# Altium PCB adc front end.PcbDoc
Units mm, origin at the board's own origin, x right, y up, seen from the top; angles counter-clockwise.
Board outline 56.13 x 31.88 mm, 2 copper layers (Top Layer, Bottom Layer); 33 components, 47 nets, 121 pads, 86 vias.
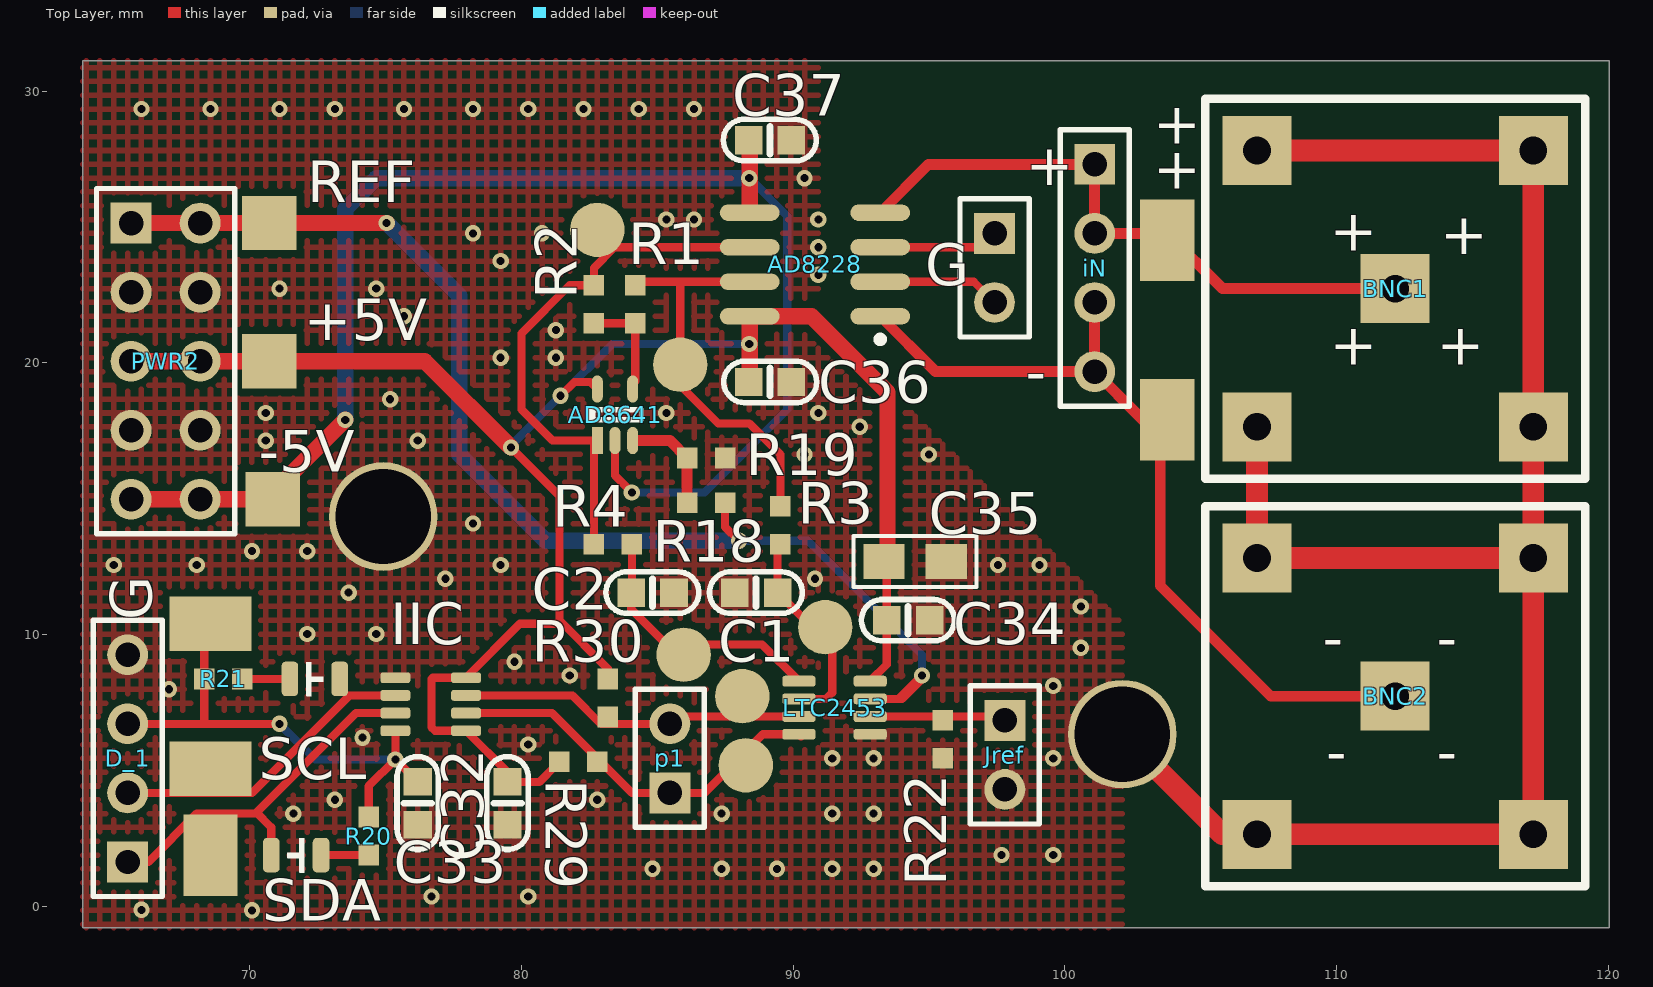
[diagram p0: Top Layer view]
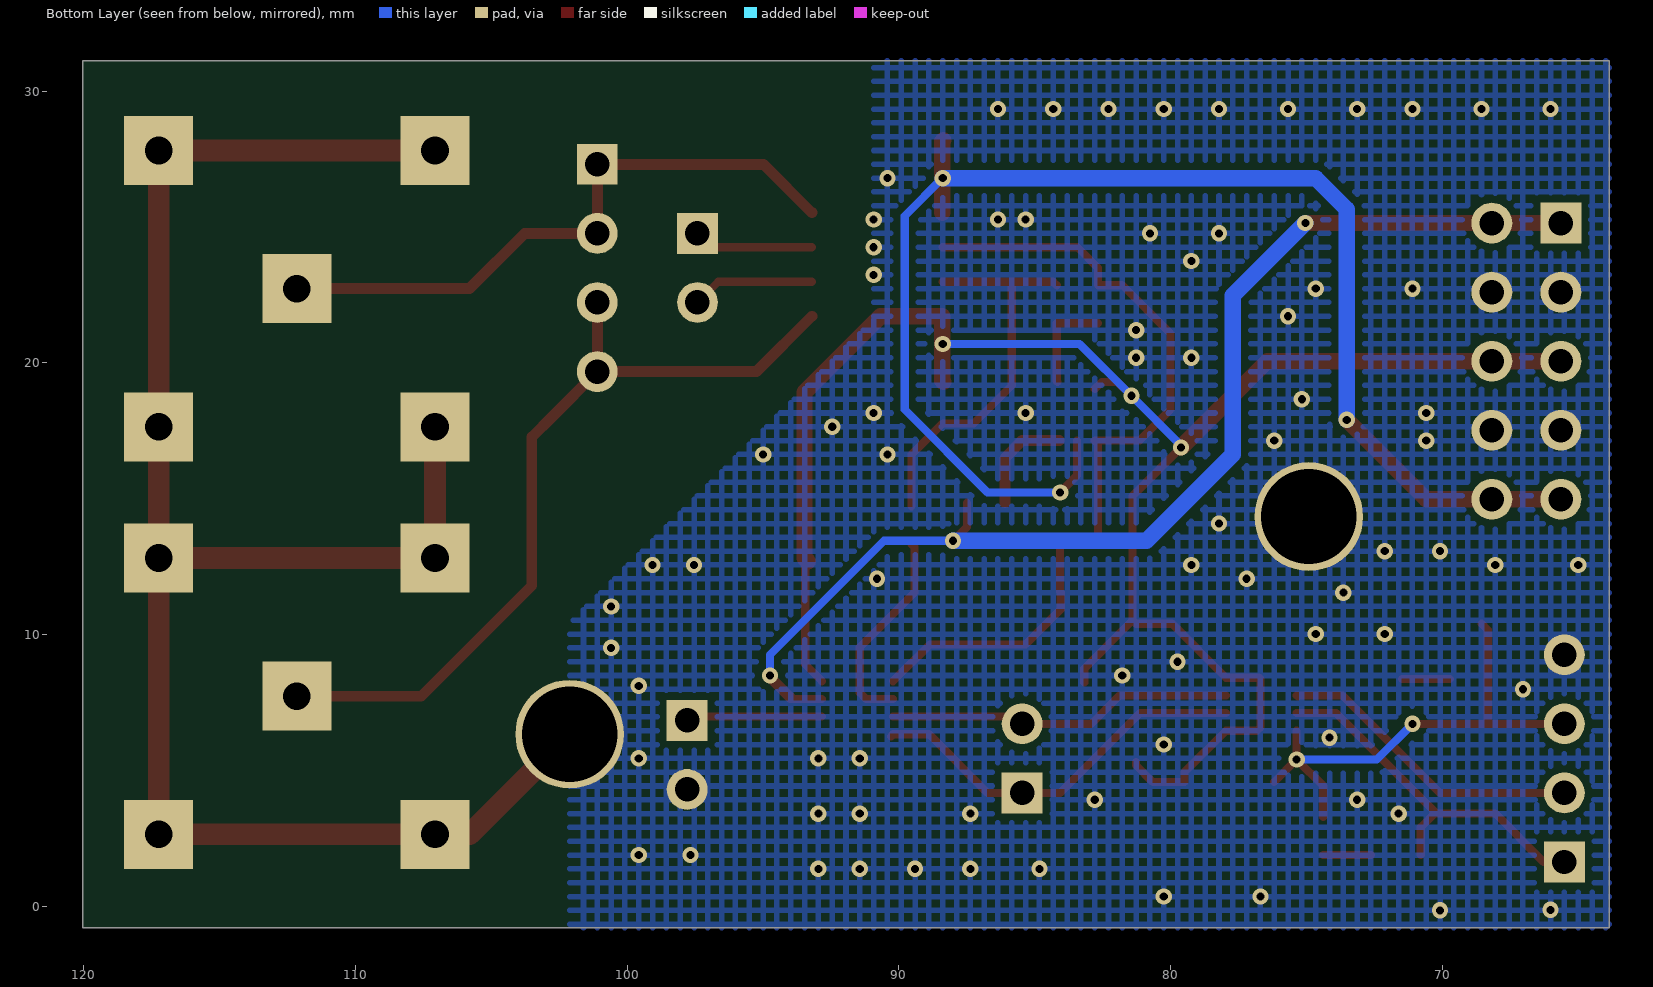
[diagram p1: Bottom Layer view, seen from below]

## Layer stack, top to bottom
Top Solder: solder mask 0.0102, Solder Resist, Dk 3.5
Top Layer: signal copper 0.0356
Dielectric 1: dielectric 0.32, FR-4, Dk 4.8
Bottom Layer: signal copper 0.0356
Bottom Solder: solder mask 0.0102, Solder Resist, Dk 3.5

## Board outline
120.015,31.115 120.015,-0.762 63.881,-0.762 63.881,31.115

## Design rules (kind name [scope] priority, off if disabled: settings)
Clearance [All] p1: gap=0.254
PolygonConnect [All] p1: connectstyle=Direct reliefconductorwidth=0.254 reliefentries=4 polygonreliefangle="90 Angle" airgapwidth=0.254
RoutingVias [All] p1: holewidth=0.711 width=1.27 viastyle="Through Hole" minholewidth=0.711 minwidth=1.27 maxholewidth=0.711 maxwidth=1.27
SolderMaskExpansion [All] p1: expansion=0.102
Width [All] p1: maxlimit=12 minlimit=0.1 preferedwidth=0.254
30 further rules are at their usual default settings.

## Components (designator, comment, footprint, x,y, rotation, side; value= is the part's Value field where it differs from the comment)
AD8228 "AD8228" SI4435 90.805,23.622 r180 top
AD8641 "AD8605" "SC-70 - 5" 82.804,17.145 r90 top
BNC1 "BNC" BNC 112.141,22.733 r270 top
BNC2 "BNC" BNC 112.141,7.747 r270 top
C1 "0.1uF" C0603 88.646,11.557 r0 top
C2 "100pF" C0603 84.836,11.557 r0 top
C32 "1uF" C0603 79.502,3.81 r270 top
C33 "1uF" C0603 76.2,3.81 r270 top
C34 "0.1uF" C0603 94.234,10.541 r0 top
C35 "10uF" 0805c 93.345,12.7 r0 top
C36 "0.1uF" C0603 89.154,19.304 r180 top
C37 "0.1uF" C0603 89.154,28.194 r0 top
D_1 "Header 4_1" HDR1X4 65.532,1.651 r90 top
G "Header 2_3" HDR1X2 97.409,24.765 r270 top
IIC "SGM4553" SOT-23-8 77.978,6.477 r180 top
iN "Header 4_1" HDR1X4 101.092,27.305 r270 top
Jref "Header 2_3" HDR1X2 97.79,6.858 r270 top
LTC2453 "LTC2453" TSOT8 92.837,6.35 r180 top
p1 "Header 2_3" HDR1X2 85.471,4.191 r90 top
PWR2 "Header 5X2_3" HDR2X5 65.659,25.146 r270 top
R1 "10K" 0603R 84.201,21.463 r90 top
R2 "10K" 0603R 82.677,22.86 r270 top
R3 "510" 0603R 89.535,14.732 r270 top
R4 "510" 0603R 82.677,13.335 r0 top
R18 "10K" 0603R 87.503,14.859 r180 top
R19 "10K" 0603R 86.106,16.51 r0 top
R20 "10K" 0603R 74.397,1.905 r90 top
R21 "10K" 0603R 69.748,8.382 r180 top
R22 "0" 0603R 95.504,5.461 r90 top
R29 "1.7K" 0603R 82.804,5.334 r180 top
R30 "1.7K" 0603R 83.185,6.985 r90 top
SCL "led" LED_0805_RED 72.415,8.382 r0 top
SDA "led" LED_0805_RED 71.73,1.905 r180 top

## Footprints (in the part's own frame and the unit in brackets; to place one, negate y for a bottom-side part, rotate by r counter-clockwise, add the part's x,y. Pads: shape width x height; smd on the part's side, far side on the other; paste and mask are expansions set on the pad)
0603R [mil]
  rect 30x30 smd: 1(0,0) 2(55,0)
  body extent -4,-18 58,16, height 18
0805c [mil]
  rect 60x50 smd: 1(0,0) 2(90,0)
  silkscreen extent -44,-37 134,37, body extent 5,-25 83,25, height 31
BNC [mil]
  rect 100x100 hole 40: 1(0,0) 2(-200,200) 2(-200,-200) 2(200,200) 2(200,-200)
  silkscreen extent -275,-275 275,275, body extent -236,-238 236,234, height 886
C0603 [mil]
  rect 40x41 smd: 1(-31,0) 2(31,0)
  silkscreen extent -68,-30 67,30, body extent -30,-15 33,17, height 12
HDR1X2 [mm] "Connector; Header; 2 Position"
  rect 1.5x1.5 hole 0.9: 1(0,0)
  round 1.5 hole 0.9: 2(2.54,0)
  silkscreen extent -1.27,-1.27 3.81,1.27, body extent -1.27,-1.27 3.81,1.27, height 7.58
HDR1X4 [mm] "Connector; Header; 4 Position"
  rect 1.5x1.5 hole 0.9: 1(0,0)
  round 1.5 hole 0.9: 2(2.54,0) 3(5.08,0) 4(7.62,0)
  silkscreen extent -1.27,-1.27 8.89,1.27, body extent -1.27,-1.27 8.89,1.27, height 7.58
HDR2X5 [mm] "Connector; Header; 5x2 Position"
  rect 1.5x1.5 hole 0.9: 1(0,0)
  round 1.5 hole 0.9: 2(0,2.54) 3(2.54,0) 4(2.54,2.54) 5(5.08,0) 6(5.08,2.54) 7(7.62,0) 8(7.62,2.54) 9(10.16,0) 10(10.16,2.54)
  silkscreen extent -1.27,-1.27 11.43,3.81, body extent -1.27,-1.27 11.43,3.81, height 7.58
LED_0805_RED [mil]
  rrect50% 24x50 smd: 1(-36,0) 2(36,0)
  silkscreen extent -12,-24 12,24, body extent -40,-25 40,25, height 43
"SC-70 - 5" [mm]
  rect 1x0.4 smd: 1(0,0)
  oval 1x0.4 smd: 2(0,-0.65) 3(0,-1.3) 4(1.9,-1.3) 5(1.9,0)
  silkscreen extent 0.76,-1.63 1.13,0.33
SI4435 [mm]
  oval 2.2x0.6 smd: 1(-2.4,1.905) 2(-2.4,0.635) 3(-2.4,-0.635) 4(-2.4,-1.905) 5(2.4,-1.905) 6(2.4,-0.635) 7(2.4,0.635) 8(2.4,1.905)
  silkscreen extent -2.53,2.63 -2.28,2.88, body extent -3.02,-2.51 3.02,2.51, height 1.6
SOT-23-8 [mm]
  rrect50% 1.1x0.4 smd: 1(0,0) 2(0,-0.65) 3(0,-1.3) 4(0,-1.95) 5(2.6,-1.95) 6(2.6,-1.3) 7(2.6,-0.65) 8(2.6,0)
  body extent -0.13,-2.49 2.67,0.45, height 1.2
TSOT8 [mm]
  rrect50% 1.22x0.4 smd: 1(0,0) 2(0,-0.65) 3(0,-1.3) 4(0,-1.95) 5(2.62,-1.95) 6(2.62,-1.3) 7(2.62,-0.65) 8(2.62,0)
  body extent 0,-2.47 2.8,0.43, height 1

## Part data
BNC1 BNC2: "BNC Connector"
C1 C2 C32 C33 C34 C35 C36 C37: library part Cap, "Capacitor"
D_1 iN: "Header, 4-Pin"
G Jref p1: "Header, 2-Pin"
IIC: library part SGM4453
PWR2: "Header, 5-Pin, Dual row"
R1 R2 R3 R4 R18 R19 R20 R21 R22 R29 R30: library part Res2, "Resistor"
SCL SDA: "Resistor"

## Free pads (board coordinates)
  round 4 hole 3.5: 0(74.93,14.351) 0(102.108,6.35)
  rect 3x2 smd: 30(68.58,5.08) 32(68.58,10.414)
  rect 2x3 smd: 31(68.58,1.905) 35(103.759,24.511) 36(103.759,17.907)
  round 2 smd: 37(82.804,24.892) 38(85.852,19.939) 39(91.186,10.287) 40(85.979,9.271) 41(88.138,7.747) 42(88.265,5.207)
  rect 2x2 smd: 43(70.866,14.986) 44(70.739,20.066) 45(70.739,25.146)

## Via types
v1: diameter 0.6, hole 0.3, Top Layer to Bottom Layer, 86 vias

## Nets (pads, with @x,y where several pads share a name; then routed paths per layer and width w, separated by ;. In a path a pad name is that pad's centre, name@x,y a point inside that pad or via, vN(x,y) a via of type N, cw(c..) or ccw(c..) an arc to the next point about the centre after c; other vN are vias at no path point)
3V3: C33.1 D_1.3 IIC.8 pad.32 R20.2 R21.2 | length 19
  Top Layer w0.3: D_1.3 68.453,6.731 ; pad.32 68.351,10.185 R21.2 68.351,6.833 68.453,6.731 ; v1(71.12,6.731) 68.453,6.731 ; R20.2 74.397,4.438 v1(75.378,5.419) ; IIC.8 v1(75.378,5.419) ; C33.1 v1(75.378,5.419)
  Bottom Layer w0.3: v1(71.12,6.731) 72.432,5.419 v1(75.378,5.419)
+5V: AD8228.8 AD8641.5 C32.1 C34.1 C35.1 C36.2 IIC.1 IIC.4 LTC2453.4 pad.44 PWR2.5 PWR2.6 R29.2 R30.2 | length 70.4
  Top Layer w0.3: v1(79.629,16.891) 81.407,15.113 81.407,10.541 ; R29.2@81.28,5.334 81.28,5.207 80.67,4.597 C32.1 79.502,4.953 IIC.1 76.835,6.477 76.708,6.604 76.708,8.382 76.753,8.427 IIC.4 79.965,10.414 81.28,10.414 81.407,10.541 ; v1(81.453,18.796) 81.961,19.304 82.545,19.304 AD8641.5 ; R30.2@83.185,8.255 83.185,8.763 81.407,10.541 ; LTC2453.4 93.447,8.91 C34.1 93.447,12.598 C35.1
  Top Layer w0.6: PWR2.5 PWR2.6 76.454,20.066 v1(79.629,16.891) ; C36.2 88.405,19.342 AD8228.8 90.678,21.717 93.472,18.923 93.472,12.827 C35.1
  Bottom Layer w0.3: v1(79.629,16.891) 79.629,16.972 v1(81.453,18.796) 83.358,20.701 v1(88.392,20.701)
+5V_IN: 
+8V: 
-5V: AD8228.5 AD8641.2 C37.1 pad.43 PWR2.9 PWR2.10 | length 53.1
  Top Layer w0.3: AD8641.2 83.454,15.86 v1(84.074,15.24)
  Top Layer w0.6: PWR2.9 PWR2.10 70.612,14.986 v1(73.533,17.907) ; C37.1 88.405,28.156 AD8228.5
  Bottom Layer w0.3: v1(84.074,15.24) 86.741,15.24 89.789,18.288 89.789,25.4 v1(88.392,26.797)
  Bottom Layer w0.6: v1(73.533,17.907) 73.533,25.654 74.676,26.797 v1(88.392,26.797)
-8V: 
CLOCK: D_1.2 IIC.6 pad.30 SCL.2 | length 11.4
  Top Layer w0.3: D_1.2 70.104,4.191 73.69,7.777 IIC.6 IIC.6@75.332,7.731
DATA: D_1.1 IIC.7 pad.31 SDA.2 | length 13.9
  Top Layer w0.3: D_1.1 66.294,1.651 68.072,3.429 70.231,3.429 70.272,3.47 ; SDA.2 70.815,2.926 70.272,3.47 ; IIC.7 73.929,7.127 70.272,3.47
GND: BNC1.2 BNC2.2 C1.1 C2.2 C32.2 C33.2 C34.2 C35.2 C36.1 C37.2 D_1.4 IIC.5 Jref.2 LTC2453.1 pad.0 PWR2.3 PWR2.4 PWR2.7 PWR2.8 R19.2 R22.1 | length 66.9
  Top Layer w0.8: pad.0@102.108,6.35 105.791,2.667 107.061,2.667 117.221,2.667 BNC2.2@117.221,12.827 ; BNC1.2@107.061,17.653 107.061,12.827 BNC2.2@117.221,12.827 ; BNC1.2@107.061,27.813 117.221,27.813 117.221,17.653 BNC2.2@117.221,12.827
  other v1: 70.104,-0.127 66.04,-0.108 76.708,0.381 80.264,0.381 84.836,1.397 87.376,1.397 89.408,1.397 91.44,1.397 92.964,1.397 97.663,1.905 99.568,1.905 71.628,3.429 87.376,3.429 91.44,3.429 92.964,3.429 73.152,3.937 82.804,3.937 91.44,5.461 92.964,5.461 99.568,5.461 80.264,5.969 74.168,6.223 67.056,8.001 99.568,8.128 81.788,8.509 79.756,9.017 100.584,9.525 72.136,10.033 74.676,10.033 100.584,11.049 73.66,11.557 77.216,12.065 90.805,12.065 65.024,12.573 68.072,12.573 79.248,12.573 97.536,12.573 99.06,12.573 70.104,13.081 72.136,13.081 78.232,14.097 90.424,16.637 94.996,16.637 70.612,17.145 76.2,17.145 92.456,17.653 70.612,18.161 85.344,18.161 90.932,18.161 75.184,18.669 79.248,20.193 81.28,20.193 81.28,21.209 75.692,21.717 71.12,22.733 74.676,22.733 90.932,23.241 79.248,23.749 90.932,24.257 78.232,24.765 80.772,24.765 85.344,25.273 86.36,25.273 90.932,25.273 90.424,26.797 66.04,29.337 68.58,29.337 71.12,29.337 73.152,29.337 75.692,29.337 78.232,29.337 80.264,29.337 82.296,29.337 84.328,29.337 86.36,29.337
LT_SCL: IIC.3 LTC2453.7 p1.2 pad.41 R30.1 | length 12.4
  Top Layer w0.3: IIC.3 81.885,7.777 82.931,6.731 p1.2 ; p1.2@85.71,7 LTC2453.7
LT_SDA: IIC.2 LTC2453.8 p1.1 pad.42 R29.1 | length 14.5
  Top Layer w0.3: IIC.2 81.138,7.127 84.074,4.191 p1.1 86.741,4.191 88.9,6.35 LTC2453.8 LTC2453.8@90.297,6.27
Net5E_1: 
Net+5E_1: 
Net+8E_1: 
Net-5E_1: 
Net-8E_1: 
NetAD8228_1: AD8228.1 BNC2.1 iN.3 iN.4 pad.36 | length 30.5
  Top Layer w0.4: AD8228.1 95.237,19.685 iN.4 ; iN.3 iN.4 ; BNC2.1 107.569,7.747 103.505,11.811 103.505,17.272 102.743,18.034 iN.4
NetAD8228_2: AD8228.2 G.2 | length 4.5
  Top Layer w0.3: AD8228.2 96.647,22.987 G.2
NetAD8228_3: AD8228.3 G.1 | length 4.4
  Top Layer w0.3: AD8228.3 96.901,24.257 G.1
NetAD8228_4: AD8228.4 BNC1.1 iN.1 iN.2 pad.35 | length 23.1
  Top Layer w0.4: AD8228.4 94.983,27.305 iN.1 iN.2 103.759,24.765 105.791,22.733 BNC1.1
NetAD8228_6: AD8228.6 AD8641.1 pad.37 R2.1 R4.1 | length 20
  Top Layer w0.3: R4.1 82.677,17.018 AD8641.1 81.153,17.145 80.01,18.288 80.01,21.082 81.788,22.86 R2.1 82.677,23.495 83.439,24.257 AD8228.6
NetAD8228_7: AD8228.7 pad.38 R1.2 R3.1 | length 14.7
  Top Layer w0.3: R1.2 84.328,22.987 85.852,22.987 ; AD8228.7 85.852,22.987 ; R3.1 89.535,16.637 88.392,17.78 87.249,17.78 85.852,19.177 85.852,22.987
NetAD8641_3: AD8641.3 R18.2 R19.1 | length 3.9
  Top Layer w0.4: AD8641.3@84.108,17.145 85.471,17.145 R19.1 R18.2
NetAD8641_4: AD8641.4 R1.1 R2.2 | length 3.7
  Top Layer w0.3: R2.2 R1.1 84.201,19.329 AD8641.4@84.176,19.304
NetC1_2: C1.2 LTC2453.6 pad.39 R3.2 | length 7.7
  Top Layer w0.3: R3.2 89.433,13.233 C1.2 91.44,9.55 91.44,7.874 91.216,7.65 LTC2453.6
NetC2_1: C2.1 LTC2453.5 pad.40 R4.2 | length 9.7
  Top Layer w0.3: R4.2 84.074,11.582 C2.1 84.049,10.947 85.344,9.652 88.865,9.652 LTC2453.5
NetC3_1: 
NetC4_2: 
NetC6_1: 
NetC7_1: 
NetC7_2: 
NetC15_2: 
NetC16_1: 
NetC21_2: 
NetC24_2: 
NetC25_1: 
NetC29_1: 
NetC30_2: 
NetD1_2: 
NetD2_1: 
NetJref_1: Jref.1 LTC2453.2 R22.2 | length 5
  Top Layer w0.3: LTC2453.2 97.648,7 Jref.1
NetR9_1: 
NetR10_1: 
NetR15_1: 
NetR20_1: R20.1 SDA.1 | length 1.8
  Top Layer w0.3: SDA.1 R20.1
NetR21_1: R21.1 SCL.1 | length 1.8
  Top Layer w0.3: R21.1 SCL.1
VREF: LTC2453.3 pad.45 PWR2.1 PWR2.2 R18.1 | length 45.1
  Top Layer w0.3: R18.1 87.503,13.97 v1(88.011,13.462) ; LTC2453.3 93.883,7.65 ; v1(94.742,8.509) 93.883,7.65 ; v1@94.869,8.509 94.01,7.65 93.883,7.65
  Top Layer w0.6: PWR2.1 PWR2.2 v1(75.057,25.146)
  Bottom Layer w0.3: v1(88.011,13.462) 90.551,13.462 94.742,9.271 v1(94.742,8.509)
  Bottom Layer w0.6: v1(75.057,25.146) 77.724,22.479 77.724,16.637 80.899,13.462 v1(88.011,13.462)

## Polygon pours and split planes (outlines as drawn)
GND on Bottom Layer "Bottom Layer-No Net" (hatched 90Degree grid 0.508 track 0.203, pour order 32): 63.881,31.115 90.932,31.115 90.932,21.59 93.599,18.923 102.108,10.414 102.108,7.874 102.108,-0.762 63.881,-0.762
GND on Top Layer "Bottom Layer-No Net" (hatched 90Degree grid 0.508 track 0.203, pour order 36): 63.881,31.115 90.932,31.115 90.932,21.59 91.059,21.463 102.108,10.414 102.108,8.89 102.108,-0.762 63.881,-0.762

## Silkscreen, mask and mechanical layers (free items; w line width, h text height)
Top Overlay:
  text "+" at 103.251,28.067 h1.52
  text "+" at 98.552,26.543 h1.52
  text "+" at 103.251,26.416 h1.52
  text "REF" at 72.136,25.908 h1.52
  text "+" at 109.728,24.13 h1.52
  text "+" at 113.792,24.003 h1.52
  text "+5V" at 72.009,20.828 h1.52
  text "+" at 109.728,19.939 h1.52
  text "+" at 113.665,19.939 h1.52
  text "-" at 98.552,18.923 h1.52
  text "-5V" at 70.358,16.002 h1.52
  text "G" at 66.421,10.541 h1.52 r90
  text "-" at 109.474,9.144 h1.52
  text "-" at 113.665,9.144 h1.52
  text "-" at 109.601,4.953 h1.52
  text "-" at 113.665,4.953 h1.52
Mechanical 1:
  the board outline again, w0.2